# EAGLE board dual ym2612 (EAGLE 6.5.0)
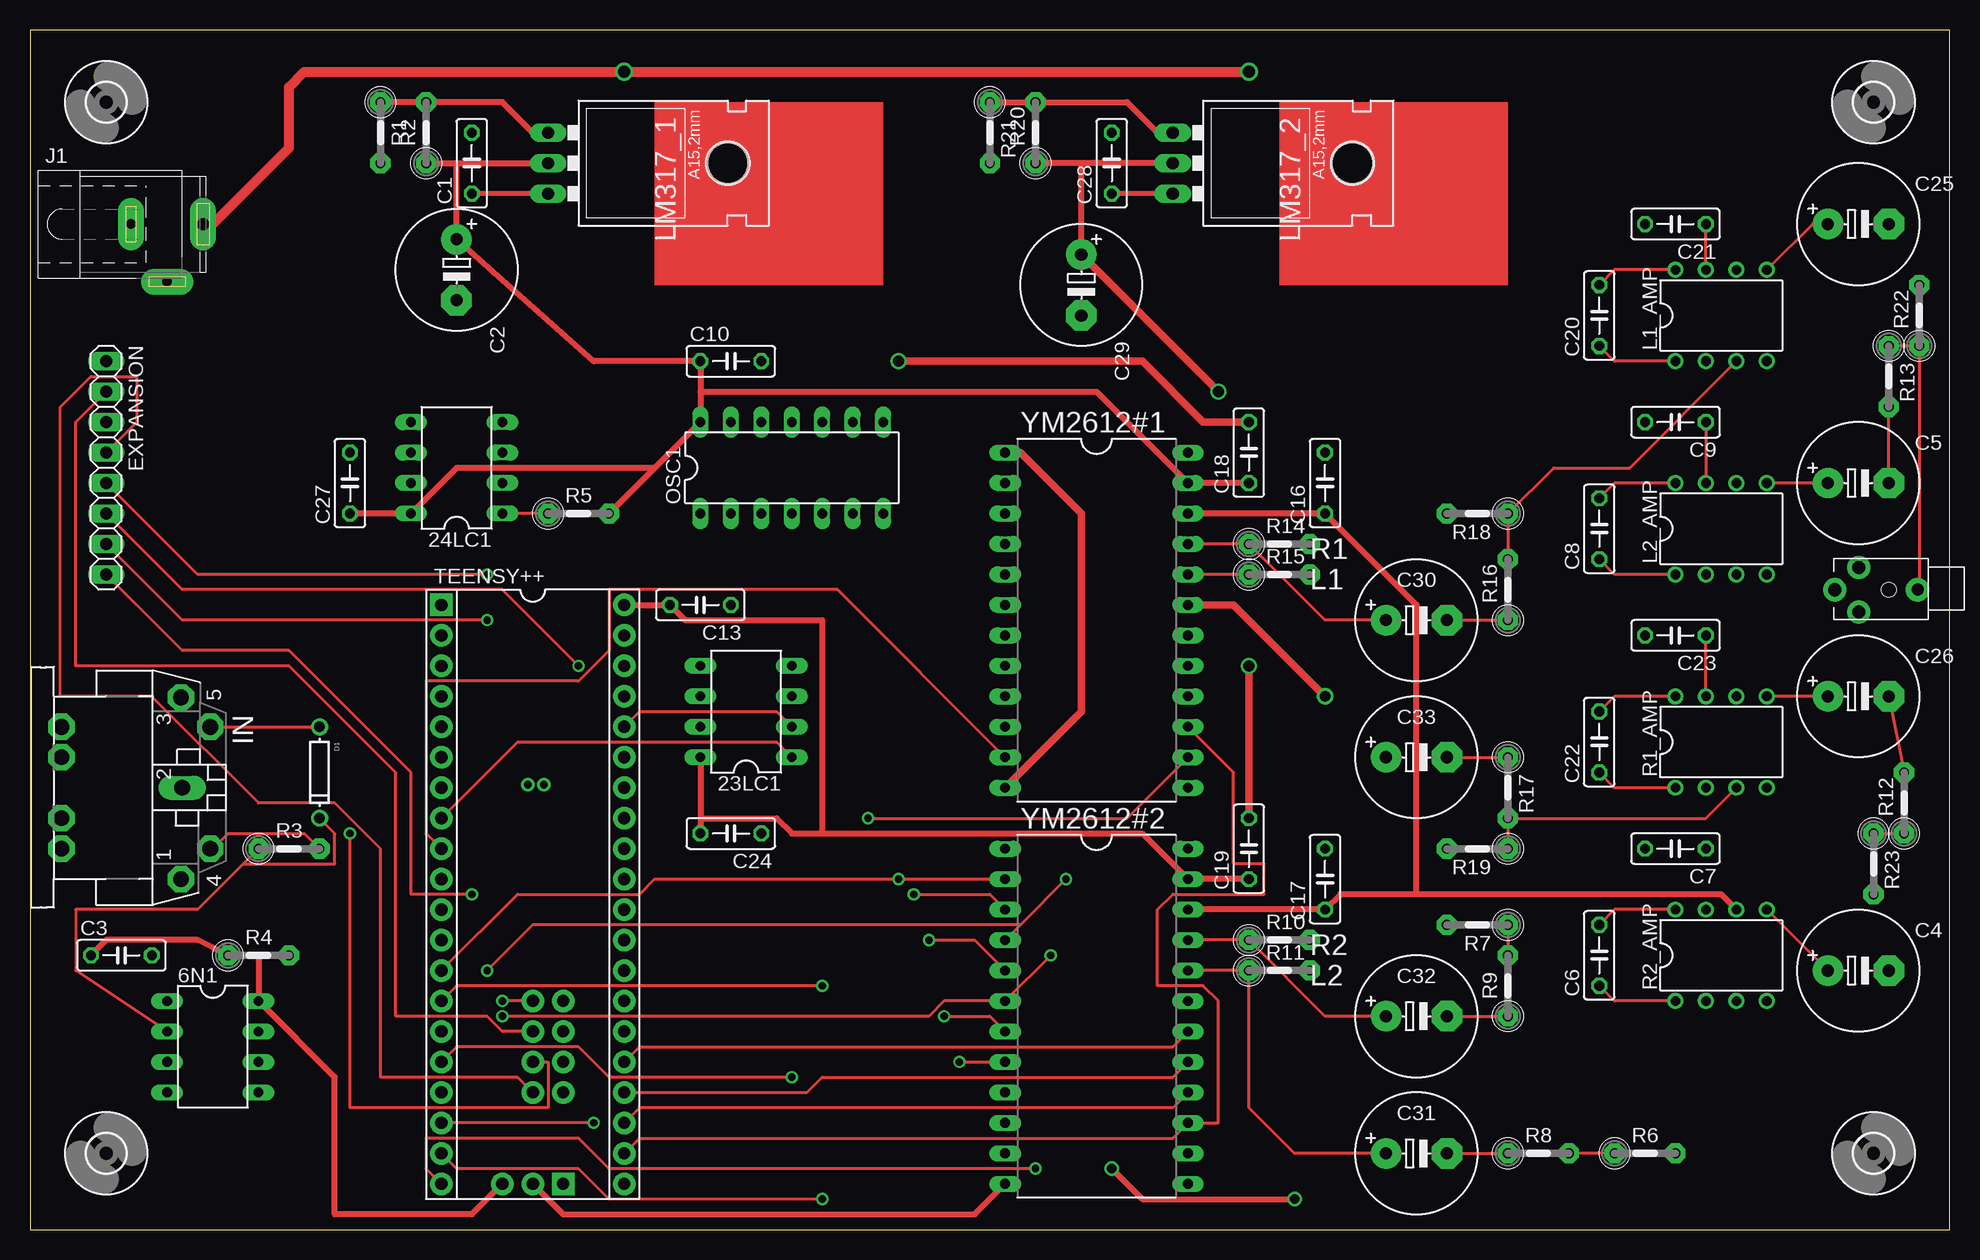
[diagram p0: board, top side]
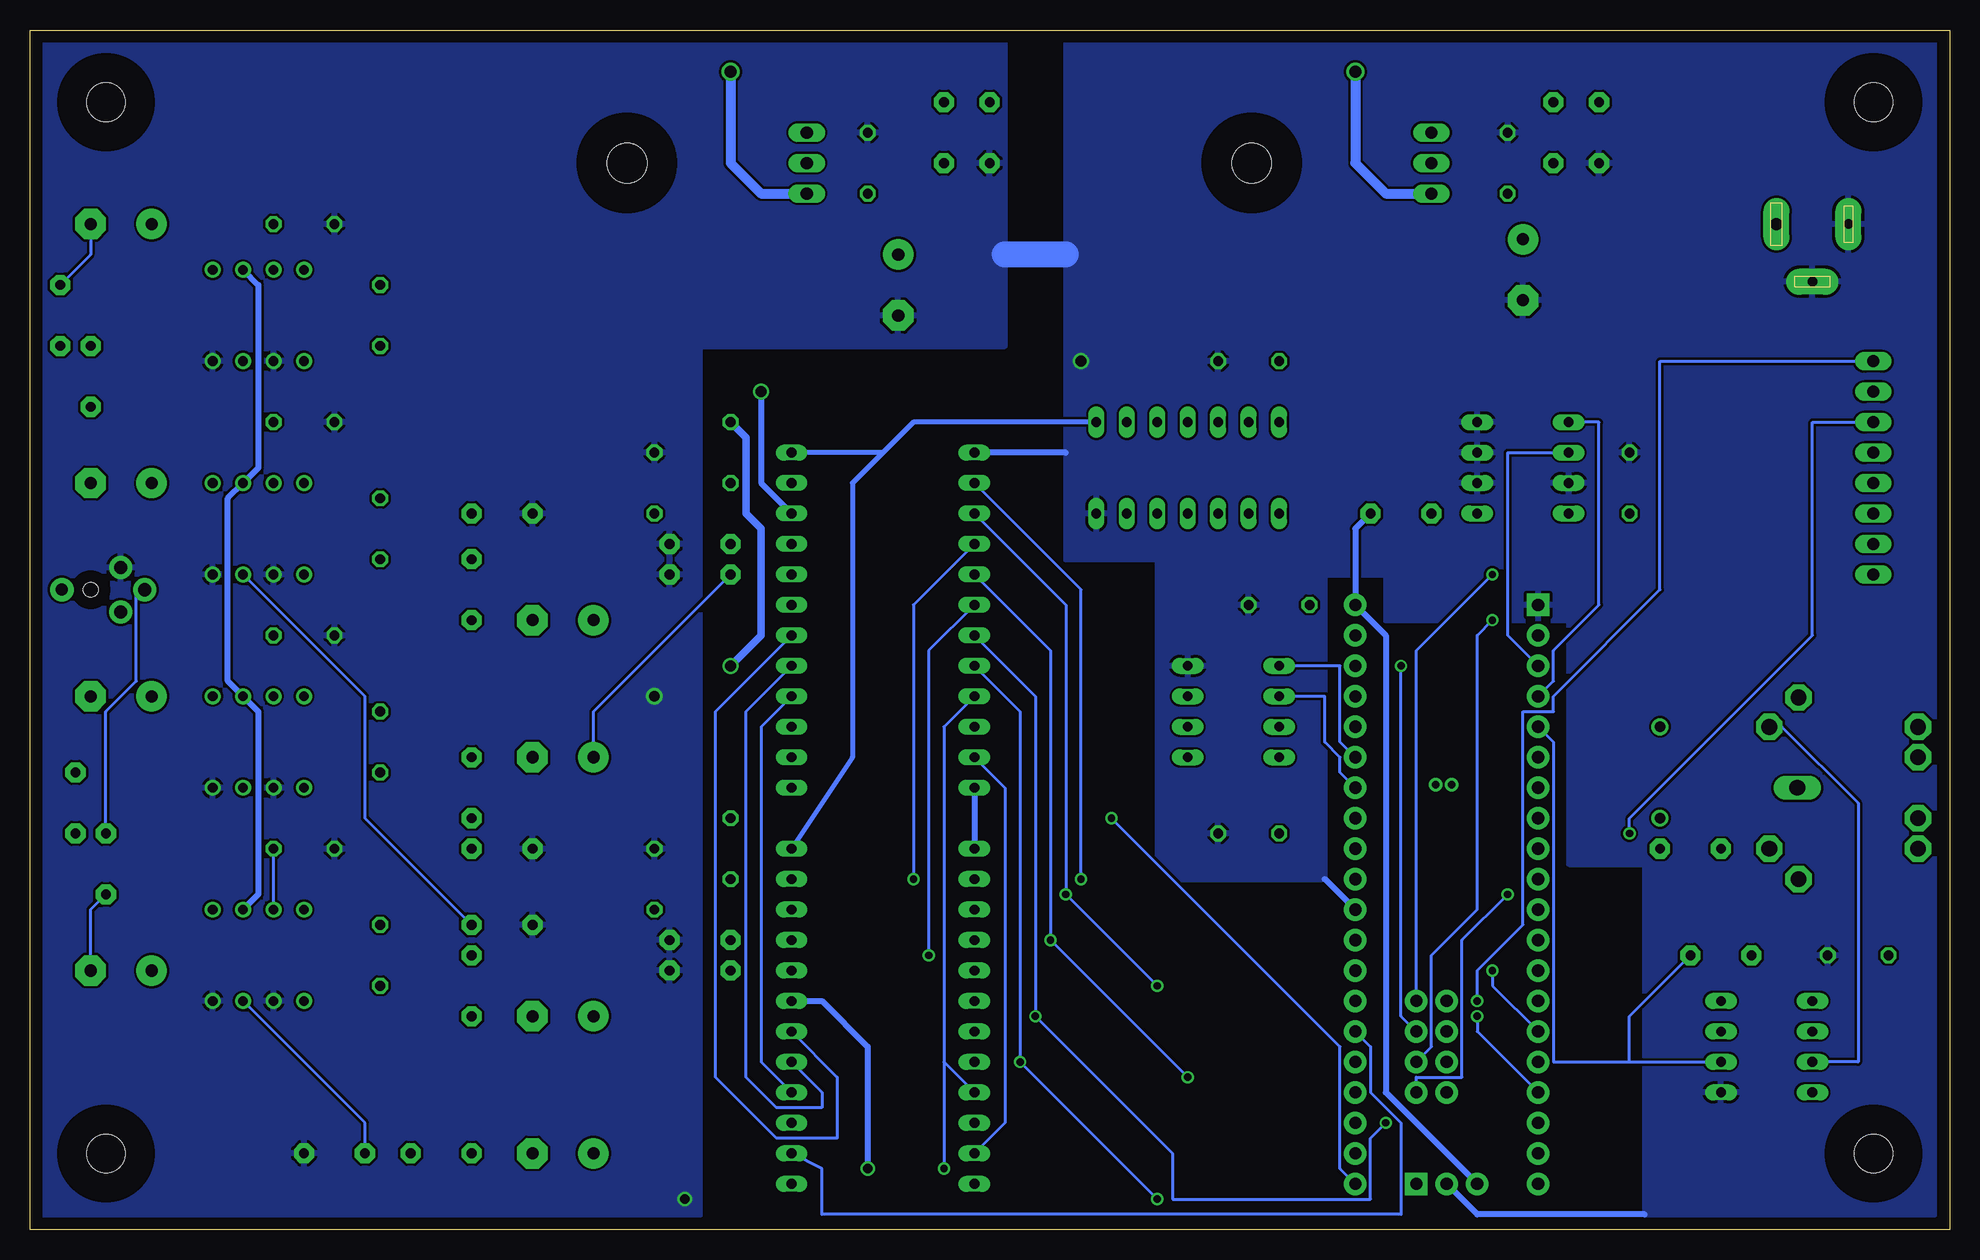
[diagram p1: board, bottom side, seen from below]

Size 160 x 100 mm. Coordinates in mm from the lower left corner, seen from the top.
Outline: 0,0 160,0 160,100 0,100 0,0
Copper layers (1*16): Top 0.035mm / dielectric 1.5mm / Bottom 0.035mm
Design rules "default": minimum track width 10mil, minimum drill 24mil, track to track 8mil, track to pad 8mil, pad to pad 8mil, via to via 8mil, smd to smd 8mil, copper to edge 40mil, drill to drill 8mil, minimum pad ring 10mil, minimum via ring 8mil, stop-mask expansion 4mil, vias tented up to drill 0mil, thermal gap 10mil
Net classes: 0 default: width 0.254 mm; 1 ground: width 0.508 mm; 2 power: width 0.508 mm

## Footprints (pad centres in the part's own frame; a part is rotated, then mirrored left to right if it is on the bottom)
DIL08 = drill 0.813 long: 1 -3.81,-3.81; 2 -1.27,-3.81; 3 1.27,-3.81; 4 3.81,-3.81; 5 3.81,3.81; 6 1.27,3.81; 7 -1.27,3.81; 8 -3.81,3.81
STEREOJACK2.5MM_STEREOJACK2.5MM = drill 1.1 pad 1.93: RING1 2.5,-1.85; RING2 2.5,1.85; TIP 4.5,0 | drill 1 pad 1.93: SHIELD -2.4,0 | hole 1.2: 0,0
C050-025X075 = drill 0.813 octagon: 1 -2.54,0; 2 2.54,0
E5-10,5 = drill 1.016 pad 2.54: + -2.54,0 | drill 1.016 pad 2.54 octagon: - 2.54,0
DO-1N4148 = drill 0.9: A -3.81,0; C 3.81,0
1X08 = drill 1.016 long: 1 -8.89,0; 2 -6.35,0; 3 -3.81,0; 4 -1.27,0; 5 1.27,0; 6 3.81,0; 7 6.35,0; 8 8.89,0
3,2 = hole 3.2: 0,0
CP-2350 = drill 1.321 pad 2.184 octagon: 1 7.62,12.58; 3 -7.52,12.58; 4 5.08,15.02; 5 -5.08,15.02; PE -2.54,2.62; PE1 -5.08,2.62; PE2 5.08,2.62; PE@ 2.54,2.62 | drill 1.321 long: 2 0,12.68
SPC4078 = drill 0.8 pad 2.184 long: 1 -3,0; 2 0,-4.8 | drill 1 pad 2.184 long: 3 3,0
DIL08' = drill 0.813 pad 1.27: 1 -3.81,-3.81; 2 -1.27,-3.81; 3 1.27,-3.81; 4 3.81,-3.81; 5 3.81,3.81; 6 1.27,3.81; 7 -1.27,3.81; 8 -3.81,3.81
317TL = drill 1.016 long: 1 -2.54,-3.81; 2 0,-3.81; 3 2.54,-3.81 | hole 3.302: 0,11.176
DIL14 = drill 0.813 long: 1 -7.62,-3.81; 2 -5.08,-3.81; 3 -2.54,-3.81; 4 0,-3.81; 5 2.54,-3.81; 6 5.08,-3.81; 7 7.62,-3.81; 8 7.62,3.81; 9 5.08,3.81; 10 2.54,3.81; 11 0,3.81; 12 -2.54,3.81; 13 -5.08,3.81; 14 -7.62,3.81
0207/5V = drill 0.813 pad 1.676 octagon: 1 -2.54,0; 2 2.54,0
TEENSY++ = drill 1.016 pad 1.88: 5V 24.13,-2.54; +5V -24.13,7.62; A0 8.89,0; A1 11.43,0; A2 13.97,0; A3 16.51,0; A4 8.89,2.54; A5 11.43,2.54; A6 13.97,2.54; A7 16.51,2.54; B0 -6.35,7.62; B1 -8.89,7.62; B2 -11.43,7.62; B3 -13.97,7.62; B4 -16.51,7.62; B5 -19.05,7.62; B6 -21.59,7.62; B7 -21.59,-7.62; C0 6.35,-7.62; C1 8.89,-7.62; C2 11.43,-7.62; C3 13.97,-7.62; C4 16.51,-7.62; C5 19.05,-7.62; C6 21.59,-7.62; C7 24.13,-7.62; D0 -19.05,-7.62; D1 -16.51,-7.62; D2 -13.97,-7.62; D3 -11.43,-7.62; D4 -8.89,-7.62; D5 -6.35,-7.62; D6 -3.81,-7.62; D7 -1.27,-7.62; E0 1.27,-7.62; E1 3.81,-7.62; E6 -1.27,7.62; E7 -3.81,7.62; F0 6.35,7.62; F1 8.89,7.62; F2 11.43,7.62; F3 13.97,7.62; F4 16.51,7.62; F5 19.05,7.62; F6 21.59,7.62; F7 24.13,7.62; GND2 24.13,0; GRND1 1.27,7.62; REF 3.81,7.62 | drill 0.635 pad 1.067: E4 -9.144,0.914; E5 -9.144,-0.406 | drill 1.016 pad 1.88 square: GND -24.13,-7.62; RST 24.13,2.54
DIL24-6 = drill 0.813 long: 1 -13.97,-7.62; 2 -11.43,-7.62; 3 -8.89,-7.62; 4 -6.35,-7.62; 5 -3.81,-7.62; 6 -1.27,-7.62; 7 1.27,-7.62; 8 3.81,-7.62; 9 6.35,-7.62; 10 8.89,-7.62; 11 11.43,-7.62; 12 13.97,-7.62; 13 13.97,7.62; 14 11.43,7.62; 15 8.89,7.62; 16 6.35,7.62; 17 3.81,7.62; 18 1.27,7.62; 19 -1.27,7.62; 20 -3.81,7.62; 21 -6.35,7.62; 22 -8.89,7.62; 23 -11.43,7.62; 24 -13.97,7.62

## Placement (x,y rotation side)
6N1  [DIL08]  15.24,15.24 270 top
23LC1  [DIL08]  59.69,43.18 90 top
24LC1  [DIL08]  35.56,63.5 90 top
AUDIO  [STEREOJACK2.5MM_STEREOJACK2.5MM]  154.94,53.34 180 top
C1  0.1bp  [C050-025X075]  36.83,88.9 90 top
C2  1bp  [E5-10,5]  35.56,80.01 270 top
C3  0.1bp  [C050-025X075]  7.62,22.86 0 top
C4  [E5-10,5]  152.4,21.59 0 top
C5  [E5-10,5]  152.4,62.23 0 top
C6  10uf  [C050-025X075]  130.81,22.86 90 top
C7  0.1bp  [C050-025X075]  137.16,31.75 180 top
C8  10uf  [C050-025X075]  130.81,58.42 90 top
C9  0.1bp  [C050-025X075]  137.16,67.31 180 top
C10  0.1bp  [C050-025X075]  58.42,72.39 0 top
C13  1bp  [C050-025X075]  55.88,52.07 180 top
C16  0.1bp  [C050-025X075]  107.95,62.23 90 top
C17  0.1bp  [C050-025X075]  107.95,29.21 90 top
C18  0.1bp  [C050-025X075]  101.6,64.77 90 top
C19  0.1bp  [C050-025X075]  101.6,31.75 90 top
C20  10uf  [C050-025X075]  130.81,76.2 90 top
C21  0.1bp  [C050-025X075]  137.16,83.82 180 top
C22  10uf  [C050-025X075]  130.81,40.64 90 top
C23  0.1bp  [C050-025X075]  137.16,49.53 180 top
C24  0.1bp  [C050-025X075]  58.42,33.02 180 top
C25  [E5-10,5]  152.4,83.82 0 top
C26  [E5-10,5]  152.4,44.45 0 top
C27  0.1bp  [C050-025X075]  26.67,62.23 90 top
C28  0.1bp  [C050-025X075]  90.17,88.9 90 top
C29  1bp  [E5-10,5]  87.63,78.74 270 top
C30  [E5-10,5]  115.57,50.8 0 top
C31  [E5-10,5]  115.57,6.35 0 top
C32  [E5-10,5]  115.57,17.78 0 top
C33  [E5-10,5]  115.57,39.37 0 top
D1  [DO-1N4148]  24.13,38.1 270 top
EXPANSION  [1X08]  6.35,63.5 270 top
H1  MOUNT-HOLE3.2  [3,2]  6.35,6.35 0 top
H2  MOUNT-HOLE3.2  [3,2]  153.67,6.35 0 top
H3  MOUNT-HOLE3.2  [3,2]  6.35,93.98 0 top
H4  MOUNT-HOLE3.2  [3,2]  153.67,93.98 0 top
IN  MIDIJACK  [CP-2350]  0,36.83 270 top
J1  [SPC4078]  11.43,83.82 0 top
L1_AMP  LM386N-1  [DIL08']  140.97,76.2 0 top
L2_AMP  LM386N-1  [DIL08']  140.97,58.42 0 top
LM317_1  [317TL]  46.99,88.9 270 top
LM317_2  [317TL]  99.06,88.9 270 top
OSC1  7.68mhz  [DIL14]  63.5,63.5 0 top
R1  1k  [0207/5V]  29.21,91.44 270 top
R1_AMP  LM386N-1  [DIL08']  140.97,40.64 0 top
R2  330  [0207/5V]  33.02,91.44 90 top
R2_AMP  LM386N-1  [DIL08']  140.97,22.86 0 top
R3  220  [0207/5V]  21.59,31.75 0 top
R4  1k  [0207/5V]  19.05,22.86 0 top
R5  10k  [0207/5V]  45.72,59.69 0 top
R6  12k  [0207/5V]  134.62,6.35 0 top
R7  12k  [0207/5V]  120.65,25.4 180 top
R8  220k  [0207/5V]  125.73,6.35 0 top
R9  220k  [0207/5V]  123.19,20.32 90 top
R10  12k  [0207/5V]  104.14,24.13 0 top
R11  12k  [0207/5V]  104.14,21.59 0 top
R12  10k  [0207/5V]  156.21,35.56 90 top
R13  10k  [0207/5V]  154.94,71.12 270 top
R14  12k  [0207/5V]  104.14,57.15 0 top
R15  12k  [0207/5V]  104.14,54.61 0 top
R16  220k  [0207/5V]  123.19,53.34 90 top
R17  220k  [0207/5V]  123.19,36.83 270 top
R18  12k  [0207/5V]  120.65,59.69 180 top
R19  12k  [0207/5V]  120.65,31.75 180 top
R20  330  [0207/5V]  83.82,91.44 90 top
R21  1k  [0207/5V]  80.01,91.44 270 top
R22  10k  [0207/5V]  157.48,76.2 90 top
R23  10k  [0207/5V]  153.67,30.48 270 top
TEENSY++  ARDUINO-TEENSY++  [TEENSY++]  41.91,27.94 270 top
YM2612#1  YM2612  [DIL24-6]  88.9,50.8 270 top
YM2612#2  YM2612  [DIL24-6]  88.9,17.78 270 top

## Library data of the parts
6N1 23LC1 24LC1 OSC1 = ic-package
AUDIO = SparkFun-Connectors
C1-C10 C13 C16-C33 = rcl
D1 IN R1-R23 = adafruit
EXPANSION = pinhead
H1-H4 = holes
J1 = con-jack; OC_FARNELL: unknown; OC_NEWARK: unknown
L1_AMP L2_AMP R1_AMP R2_AMP = linear
LM317_1 LM317_2 = v-reg
TEENSY++ = teensypp
YM2612#1 YM2612#2 = ym2612

## Nets
+5V [power]: 6N1.8 23LC1.8 24LC1.8 C2.+ C3.1 C10.1 C13.2 C18.1 C19.1 C24.2 C27.1 LM317_1.2 OSC1.14 R2.1 R4.1 R5.2 TEENSY++.5V TEENSY++.+5V YM2612#1.23 YM2612#2.23
DATA0: TEENSY++.C0 YM2612#1.2 YM2612#2.2
DATA1: TEENSY++.C1 YM2612#1.3 YM2612#2.3
DATA2: TEENSY++.C2 YM2612#1.4 YM2612#2.4
DATA3: TEENSY++.C3 YM2612#1.5 YM2612#2.5
DATA4: TEENSY++.C4 YM2612#1.6 YM2612#2.6
DATA5: TEENSY++.C5 YM2612#1.7 YM2612#2.7
DATA6: TEENSY++.C6 YM2612#1.8 YM2612#2.8
DATA7: TEENSY++.C7 YM2612#1.9 YM2612#2.9
GND [ground]: 6N1.5 23LC1.4 24LC1.2 24LC1.3 24LC1.4 24LC1.7 AUDIO.RING1 C1.2 C2.- C3.2 C7.2 C9.2 C10.2 C13.1 C16.2 C17.2 C18.2 C19.2 C21.2 C23.2 C24.1 C27.2 C28.2 C29.- J1.1 J1.2 L1_AMP.2 L1_AMP.4 L2_AMP.2 L2_AMP.4 OSC1.7 R1.2 R1_AMP.2 R1_AMP.4 R2_AMP.2 R2_AMP.4 R6.2 R7.2 R10.2 R11.2 R14.2 R15.2 R18.2 R19.2 R21.2 TEENSY++.GND TEENSY++.GND2 TEENSY++.GRND1 YM2612#1.1 YM2612#1.12 YM2612#1.19 YM2612#2.1 YM2612#2.12 YM2612#2.19
N$1: TEENSY++.D6 YM2612#1.11 YM2612#2.11
N$2: TEENSY++.F7 YM2612#1.14
N$3: TEENSY++.F2 YM2612#2.14
N$4: TEENSY++.F3 YM2612#1.18 YM2612#2.18
N$5: TEENSY++.F4 YM2612#1.17 YM2612#2.17
N$6: TEENSY++.F5 YM2612#1.16 YM2612#2.16
N$7: TEENSY++.F6 YM2612#1.15 YM2612#2.15
N$8: OSC1.8 YM2612#1.24 YM2612#2.24
N$9: IN.4 R3.2
N$10: EXPANSION.1 TEENSY++.A0
N$11: 6N1.3 D1.A IN.5
N$12: 6N1.2 D1.C R3.1
N$13: C33.+ R15.1 YM2612#1.20
N$14: C30.+ R14.1 YM2612#1.21
N$15: 24LC1.1 R5.1
N$16: C31.- R8.1
N$17: R2_AMP.3 R6.1 R8.2
N$18: 24LC1.5 TEENSY++.D1
N$19: 24LC1.6 TEENSY++.D0
N$20: 23LC1.5 TEENSY++.B2
N$21: 23LC1.6 TEENSY++.B1
N$22: 23LC1.1 TEENSY++.D5
N$23: 23LC1.2 TEENSY++.B3
N$24: TEENSY++.B5
N$25: 6N1.6 R4.2 TEENSY++.D2
N$26: EXPANSION.2 TEENSY++.A1
N$27: EXPANSION.3 TEENSY++.A2
N$28: EXPANSION.4 TEENSY++.A3
N$29: EXPANSION.5 TEENSY++.A4
N$30: EXPANSION.6 TEENSY++.A5
N$31: EXPANSION.7 TEENSY++.A6
N$32: EXPANSION.8 TEENSY++.A7
N$33: C6.1 R2_AMP.1
N$34: C32.+ R10.1 YM2612#2.21
N$35: C31.+ R11.1 YM2612#2.20
N$36: C6.2 R2_AMP.8
N$37: C7.1 R2_AMP.7
N$38: C30.- R16.1
N$39: L1_AMP.3 R16.2 R18.1
N$40: C20.1 L1_AMP.1
N$41: C20.2 L1_AMP.8
N$42: C21.1 L1_AMP.7
N$43: C33.- R17.1
N$44: L2_AMP.3 R7.1 R9.2
N$45: C8.1 L2_AMP.1
N$46: C8.2 L2_AMP.8
N$47: C9.1 L2_AMP.7
N$48: C32.- R9.1
N$49: R1_AMP.3 R17.2 R19.1
N$50: C22.1 R1_AMP.1
N$51: C22.2 R1_AMP.8
N$52: C23.1 R1_AMP.7
N$53: C5.+ L2_AMP.5
N$54: C4.+ R2_AMP.5
N$55: C25.+ L1_AMP.5
N$56: C26.+ R1_AMP.5
N$57: C25.- R22.2
N$58: AUDIO.TIP R12.1 R23.1
N$59: C4.- R23.2
N$60: AUDIO.SHIELD R13.1 R22.1
N$61: C5.- R13.2
N$62: C1.1 C28.1 J1.3 LM317_1.3 LM317_2.3
N$63: C26.- R12.2
N$64 [ground]: LM317_1.1 R1.1 R2.2
N$65 [ground]: LM317_2.1 R20.2 R21.1
VDD [power]: C16.1 C17.1 C29.+ L1_AMP.6 L2_AMP.6 LM317_2.2 R1_AMP.6 R2_AMP.6 R20.1 YM2612#1.22 YM2612#2.22

## Tracks (layer width: path | path; a pad name or v marks a point on that pad's centre or on a via)
+5V
  Top 0.508: C19.1 YM2612#2.23 92.71,33.02 66.04,33.02 | 23LC1.8 55.88,34.29 | 55.88,34.29 C24.2 | 66.04,33.02 63.5,33.02 62.23,34.29 55.88,34.29 | C3.1 6.35,24.13 13.97,24.13 R4.1 19.05,22.86 6N1.8 25.4,12.7 25.4,1.27 36.83,1.27 TEENSY++.5V | R2.1 35.56,88.9 | 35.56,88.9 LM317_1.2 | C18.1 YM2612#1.23 88.9,69.85 55.88,69.85 | TEENSY++.+5V C13.2 54.61,50.8 66.04,50.8 66.04,33.02 | C27.1 24LC1.8 35.56,63.5 52.07,63.5 | 55.88,69.85 C10.1 46.99,72.39 C2.+ 35.56,88.9 | 55.88,69.85 OSC1.14 52.07,63.5 | 52.07,63.5 R5.2
  Bottom 0.508: R5.2 49.53,58.42 TEENSY++.+5V 46.99,49.53 46.99,11.43 TEENSY++.5V
DATA0  (via drill 0.61)
  Top 0.254: YM2612#2.2 v72.39,29.21 52.07,29.21 50.8,27.94 40.64,27.94 TEENSY++.C0
  Bottom 0.254: YM2612#1.2 72.39,53.34 v72.39,29.21
DATA1  (via drill 0.61)
  Top 0.254: YM2612#2.3 80.01,27.94 v73.66,27.94 | TEENSY++.C1 35.56,20.32 v66.04,20.32
  Bottom 0.254: YM2612#1.3 73.66,52.07 v73.66,27.94 v66.04,20.32
DATA2  (via drill 0.61)
  Top 0.254: v86.36,29.21 82.55,25.4 | 82.55,25.4 YM2612#2.4 | v38.1,21.59 41.91,25.4 82.55,25.4
  Bottom 0.254: v86.36,29.21 86.36,52.07 YM2612#1.4 | TEENSY++.C2 38.1,20.32 v38.1,21.59
DATA3  (via drill 0.61)
  Top 0.254: YM2612#2.5 78.74,24.13 v74.93,24.13 | TEENSY++.C3 35.56,15.24 45.72,15.24 48.26,12.7 v63.5,12.7
  Bottom 0.254: YM2612#1.5 74.93,48.26 v74.93,24.13 v63.5,12.7
DATA4  (via drill 0.61)
  Top 0.254: v85.09,22.86 YM2612#2.6 76.2,19.05 74.93,17.78 v39.37,17.78
  Bottom 0.254: v85.09,22.86 85.09,48.26 YM2612#1.6 | TEENSY++.C4 39.37,16.51 v39.37,17.78
DATA5  (via drill 0.61)
  Top 0.254: YM2612#2.7 80.01,17.78 v76.2,17.78 | v46.99,8.89 TEENSY++.C5
  Bottom 0.254: YM2612#1.7 76.2,44.45 v76.2,17.78 64.77,6.35 64.77,2.54 48.26,2.54 48.26,7.62 v46.99,8.89
DATA6  (via drill 0.61)
  Top 0.254: v77.47,13.97 YM2612#2.8 | TEENSY++.C6 35.56,5.08 45.72,5.08 48.26,2.54 v66.04,2.54
  Bottom 0.254: YM2612#1.8 77.47,43.18 v77.47,13.97 v66.04,2.54
DATA7  (via drill 0.61)
  Top 0.254: TEENSY++.C7 33.02,5.08 33.02,7.62 45.72,7.62 48.26,5.08 v83.82,5.08
  Bottom 0.254: 83.82,13.97 YM2612#2.9 | 83.82,13.97 83.82,41.91 YM2612#1.9 | 83.82,13.97 v83.82,5.08
GND  (via drill 0.8, 0.9)
  Top 0.508: YM2612#2.12 78.74,1.27 44.45,1.27 TEENSY++.GND2 | v90.17,5.08 92.71,2.54 v105.41,2.54
  Top 0.61: v101.6,46.99 C19.2 | YM2612#1.1 82.55,64.77 87.63,59.69 87.63,43.18 YM2612#1.12 | YM2612#1.19 100.33,52.07 v107.95,44.45 | C18.2 97.79,67.31 92.71,72.39 v72.39,72.39
  Bottom 0.508: YM2612#1.12 YM2612#2.1 | 73.66,64.77 YM2612#1.1 | 52.07,29.21 TEENSY++.GRND1 | TEENSY++.GND2 39.37,1.27 25.4,1.27 | YM2612#2.19 93.98,19.05 90.17,15.24 v90.17,5.08
  Bottom 0.61: C18.2 100.33,66.04 100.33,59.69 99.06,58.42 99.06,49.53 v101.6,46.99
  Bottom 2.184: 73.66,81.28 78.74,81.28
  pour Bottom: 160.02,1.27 104.14,1.27 104.14,73.66 78.74,73.66 78.74,99.06 160.02,99.06
  pour Bottom: 73.66,99.06 73.66,55.88 66.04,55.88 66.04,29.21 52.07,29.21 52.07,54.61 46.99,54.61 46.99,50.8 31.75,50.8 31.75,30.48 25.4,30.48 25.4,1.27 1.27,1.27 1.27,99.06
N$1
  Top 0.254: TEENSY++.D6 33.02,33.02 33.02,45.72 45.72,45.72 48.26,48.26 48.26,53.34 67.31,53.34 YM2612#1.11
  Bottom 0.254: YM2612#2.11 78.74,8.89 78.74,36.83 YM2612#1.11
N$2  (via drill 0.61)
  Top 0.254: YM2612#1.14 91.44,34.29 v69.85,34.29
  Bottom 0.254: v69.85,34.29 50.8,15.24 50.8,5.08 TEENSY++.F7
N$3
  Bottom 0.254: YM2612#2.14 93.98,5.08 93.98,1.27 45.72,1.27 45.72,8.89 48.26,11.43 48.26,15.24 TEENSY++.F2
N$4
  Top 0.254: YM2612#2.18 95.25,15.24 50.8,15.24 TEENSY++.F3
  Bottom 0.254: YM2612#1.18 102.87,43.18 102.87,12.7 97.79,7.62 92.71,7.62 92.71,12.7 YM2612#2.18
N$5
  Top 0.254: YM2612#2.17 95.25,12.7 66.04,12.7 64.77,11.43 TEENSY++.F4
  Bottom 0.254: YM2612#1.17 100.33,43.18 100.33,12.7 97.79,10.16 93.98,10.16 93.98,11.43 YM2612#2.17
N$6
  Top 0.254: TEENSY++.F5 50.8,10.16 95.25,10.16 YM2612#2.16
  Bottom 0.254: YM2612#2.16 99.06,13.97 99.06,41.91 YM2612#1.16
N$7
  Top 0.254: TEENSY++.F6 50.8,7.62 95.25,7.62 YM2612#2.15 99.06,8.89 99.06,19.05 97.79,20.32 93.98,20.32 93.98,26.67 95.25,27.94 102.87,27.94 102.87,30.48 100.33,30.48 100.33,38.1 YM2612#1.15
N$8
  Bottom 0.406: YM2612#2.24 91.44,39.37 91.44,62.23 88.9,64.77 | OSC1.8 86.36,67.31 88.9,64.77 | 88.9,64.77 YM2612#1.24
N$9
  Top 0.254: R3.2 22.86,33.02 16.51,33.02 15.24,31.75 IN.4
N$10  (via drill 0.61)
  Top 0.254: TEENSY++.A0 v39.37,19.05
  Bottom 0.254: EXPANSION.1 24.13,72.39 24.13,53.34 33.02,44.45 33.02,43.18 35.56,43.18 35.56,25.4 39.37,21.59 v39.37,19.05
N$11
  Top 0.254: IN.5 D1.A
  Bottom 0.254: IN.5 13.97,41.91 7.62,35.56 7.62,13.97 6N1.3
N$12
  Top 0.254: 6N1.2 3.81,21.59 3.81,26.67 13.97,26.67 17.78,30.48 | R3.1 17.78,30.48 | D1.C 25.4,33.02 25.4,30.48 17.78,30.48
N$13
  Top 0.254: R15.1 YM2612#1.20
  Bottom 0.254: R15.1 113.03,43.18 C33.+
N$14
  Top 0.254: YM2612#1.21 R14.1 107.95,50.8 C30.+
N$15
  Top 0.254: R5.1 24LC1.1
N$16
  Top 0.254: C31.- R8.1
N$17
  Top 0.254: R6.1 R8.2
  Bottom 0.254: R2_AMP.3 132.08,8.89 R6.1
N$18
  Bottom 0.254: 24LC1.5 29.21,67.31 29.21,52.07 33.02,48.26 33.02,45.72 TEENSY++.D1
N$19
  Bottom 0.254: 24LC1.6 36.83,64.77 36.83,49.53 TEENSY++.D0
N$20
  Bottom 0.254: 23LC1.5 50.8,46.99 50.8,40.64 TEENSY++.B2
N$21
  Bottom 0.254: 23LC1.6 52.07,44.45 52.07,40.64 50.8,39.37 50.8,38.1 TEENSY++.B1
N$22
  Top 0.254: 23LC1.1 62.23,40.64 40.64,40.64 TEENSY++.D5
N$23
  Top 0.254: 23LC1.2 62.23,43.18 50.8,43.18 TEENSY++.B3
N$25
  Bottom 0.254: TEENSY++.D2 33.02,40.64 33.02,13.97 26.67,13.97 | 26.67,13.97 6N1.6 | R4.2 26.67,17.78 26.67,13.97
N$26
  Top 0.254: EXPANSION.2 3.81,67.31 3.81,46.99 21.59,46.99 30.48,38.1 30.48,17.78 38.1,17.78 39.37,16.51 TEENSY++.A1
N$27  (via drill 0.61)
  Top 0.254: v26.67,33.02 26.67,10.16 43.18,10.16 43.18,13.97 TEENSY++.A2
  Bottom 0.254: EXPANSION.3 11.43,67.31 11.43,49.53 26.67,34.29 v26.67,33.02
N$28
  Top 0.254: EXPANSION.4 8.89,67.31 8.89,71.12 5.08,71.12 2.54,68.58 2.54,44.45 10.16,44.45 19.05,35.56 25.4,35.56 29.21,31.75 29.21,12.7 40.64,12.7 TEENSY++.A3
N$29  (via drill 0.61)
  Top 0.254: EXPANSION.5 13.97,54.61 v38.1,54.61
  Bottom 0.254: v38.1,54.61 44.45,48.26 TEENSY++.A4
N$30  (via drill 0.61)
  Top 0.254: EXPANSION.6 12.7,53.34 39.37,53.34 v45.72,46.99
  Bottom 0.254: v45.72,46.99 45.72,17.78 TEENSY++.A5
N$31  (via drill 0.61)
  Top 0.254: EXPANSION.7 12.7,50.8 v38.1,50.8
  Bottom 0.254: v38.1,50.8 39.37,49.53 39.37,26.67 43.18,22.86 43.18,15.24 TEENSY++.A6
N$32  (via drill 0.61)
  Top 0.254: EXPANSION.8 12.7,48.26 21.59,48.26 31.75,38.1 31.75,27.94 v36.83,27.94
  Bottom 0.254: v36.83,27.94 40.64,24.13 40.64,12.7 44.45,12.7 TEENSY++.A7
N$33
  Top 0.254: C6.1 132.08,19.05 R2_AMP.1
N$34
  Top 0.254: YM2612#2.21 R10.1 107.95,17.78 C32.+
N$35
  Top 0.254: YM2612#2.20 R11.1 101.6,10.16 105.41,6.35 C31.+
N$36
  Top 0.254: C6.2 132.08,26.67 R2_AMP.8
N$37
  Bottom 0.254: R2_AMP.7 C7.1
N$38
  Top 0.254: C30.- R16.1
N$39
  Top 0.254: L1_AMP.3 133.35,63.5 127,63.5 R18.1 R16.2
N$40
  Top 0.254: C20.1 132.08,72.39 L1_AMP.1
N$41
  Top 0.254: C20.2 132.08,80.01 L1_AMP.8
N$42
  Top 0.254: L1_AMP.7 C21.1
N$43
  Top 0.254: C33.- R17.1
N$44
  Top 0.254: R7.1 R9.2
  Bottom 0.254: L2_AMP.3 132.08,44.45 132.08,34.29 R7.1
N$45
  Top 0.254: C8.1 132.08,54.61 L2_AMP.1
N$46
  Top 0.254: C8.2 132.08,62.23 L2_AMP.8
N$47
  Top 0.254: C9.1 L2_AMP.7
N$48
  Top 0.254: C32.- R9.1
N$49
  Top 0.254: R1_AMP.3 139.7,34.29 R17.2 R19.1
N$50
  Top 0.254: C22.1 132.08,36.83 R1_AMP.1
N$51
  Top 0.254: C22.2 132.08,44.45 R1_AMP.8
N$52
  Top 0.254: R1_AMP.7 C23.1
N$53
  Top 0.254: C5.+ L2_AMP.5
N$54
  Top 0.254: C4.+ R2_AMP.5
N$55
  Top 0.254: L1_AMP.5 148.59,83.82 C25.+
N$56
  Top 0.254: C26.+ R1_AMP.5
N$57
  Bottom 0.254: R22.2 154.94,81.28 C25.-
N$58
  Top 0.254: R23.1 R12.1
  Bottom 0.254: R23.1 153.67,43.18 151.13,45.72 151.13,53.34 AUDIO.TIP
N$59
  Bottom 0.254: R23.2 154.94,26.67 C4.-
N$60
  Top 0.254: R13.1 R22.1 157.48,53.34 AUDIO.SHIELD
N$61
  Top 0.254: C5.- R13.2
N$62  (via drill 1)
  Top 0.254: 15.24,83.82 J1.3
  Top 0.406: LM317_2.3 C28.1 | LM317_1.3 C1.1
  Top 0.813: 15.24,83.82 21.59,90.17 21.59,95.25 22.86,96.52 v49.53,96.52 v101.6,96.52
  Bottom 0.813: v101.6,96.52 101.6,88.9 99.06,86.36 LM317_2.3 | v49.53,96.52 49.53,88.9 46.99,86.36 LM317_1.3
N$63
  Top 0.254: C26.- R12.2
N$64
  Top 0.508: R1.1 R2.2 39.37,93.98 41.91,91.44 LM317_1.1
N$65
  Top 0.508: R21.1 R20.2 91.44,93.98 93.98,91.44 LM317_2.1
VDD  (via drill 0.9)
  Top 0.508: YM2612#1.22 C16.1 115.57,52.07 115.57,27.94 | YM2612#2.22 C17.1 109.22,27.94 115.57,27.94 | 115.57,27.94 140.97,27.94 R2_AMP.6 | LM317_2.2 87.63,88.9 | 87.63,88.9 R20.1 | C29.+ 87.63,88.9
  Top 0.61: C29.+ v99.06,69.85
  Bottom 0.508: YM2612#1.22 99.06,62.23 v99.06,69.85 | L1_AMP.6 140.97,78.74 140.97,63.5 L2_AMP.6 143.51,60.96 143.51,45.72 R1_AMP.6 140.97,43.18 140.97,27.94 R2_AMP.6
(copper drawn outside any net)
  shapes: Top area x2

## Text on the board
tNames: R1 | L1 | R2 | L2
tDocu: YM2612 Synth | spritesmind.net | Version 0